# EAGLE board OBC_revA (EAGLE 5.11), part 1 of 2
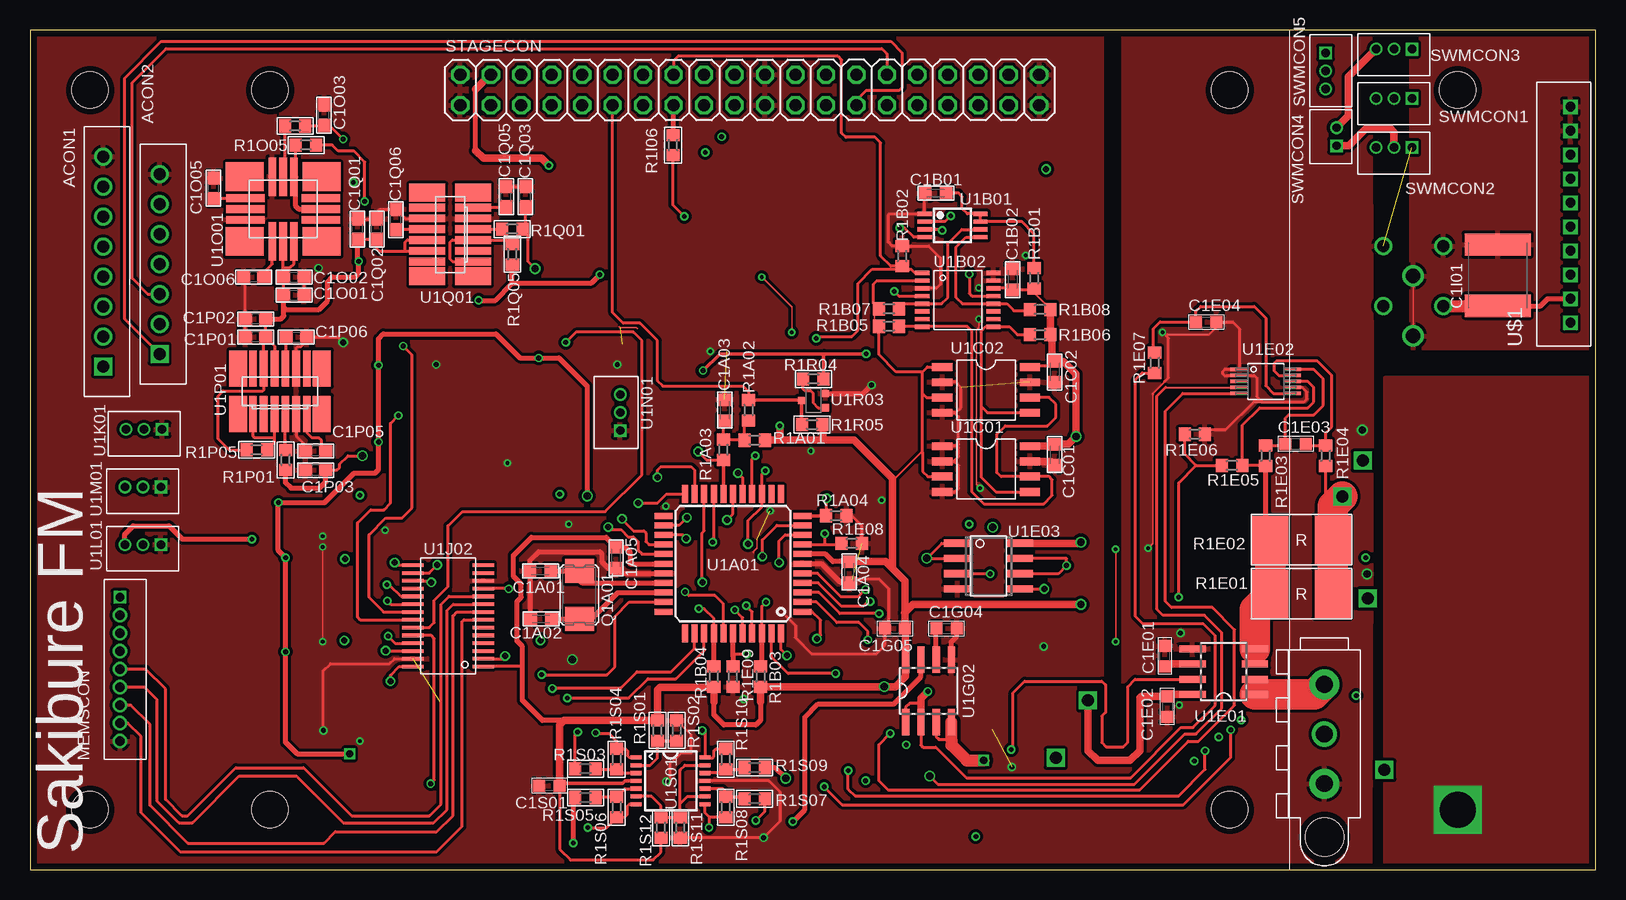
[diagram p0: board, top side]
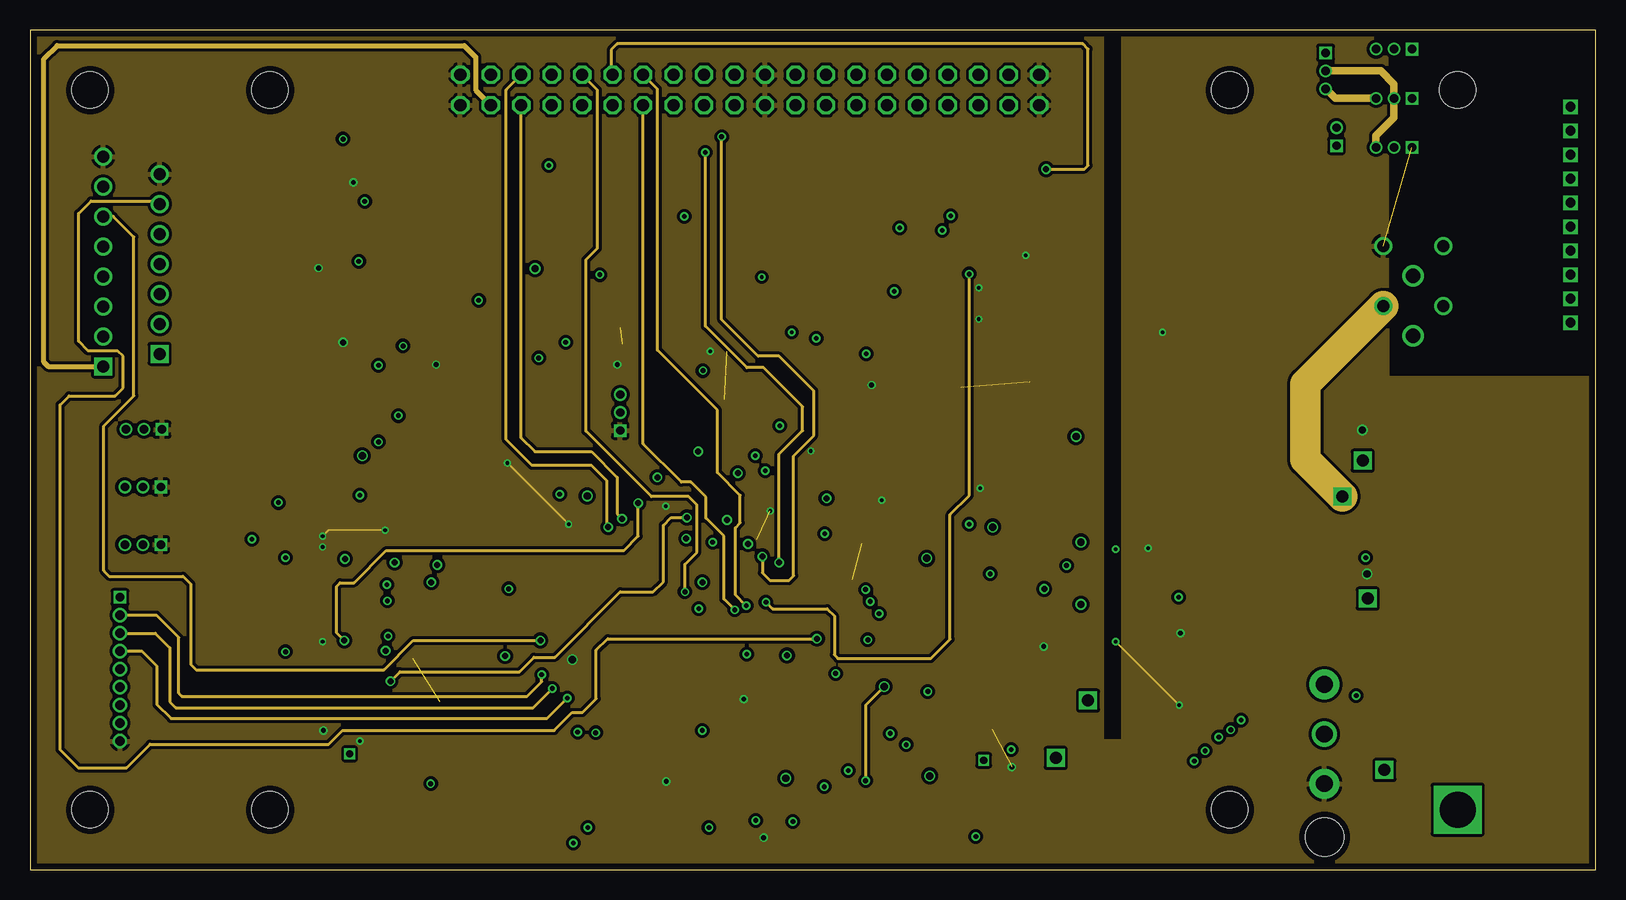
[diagram p1: board, inner layer Route2]
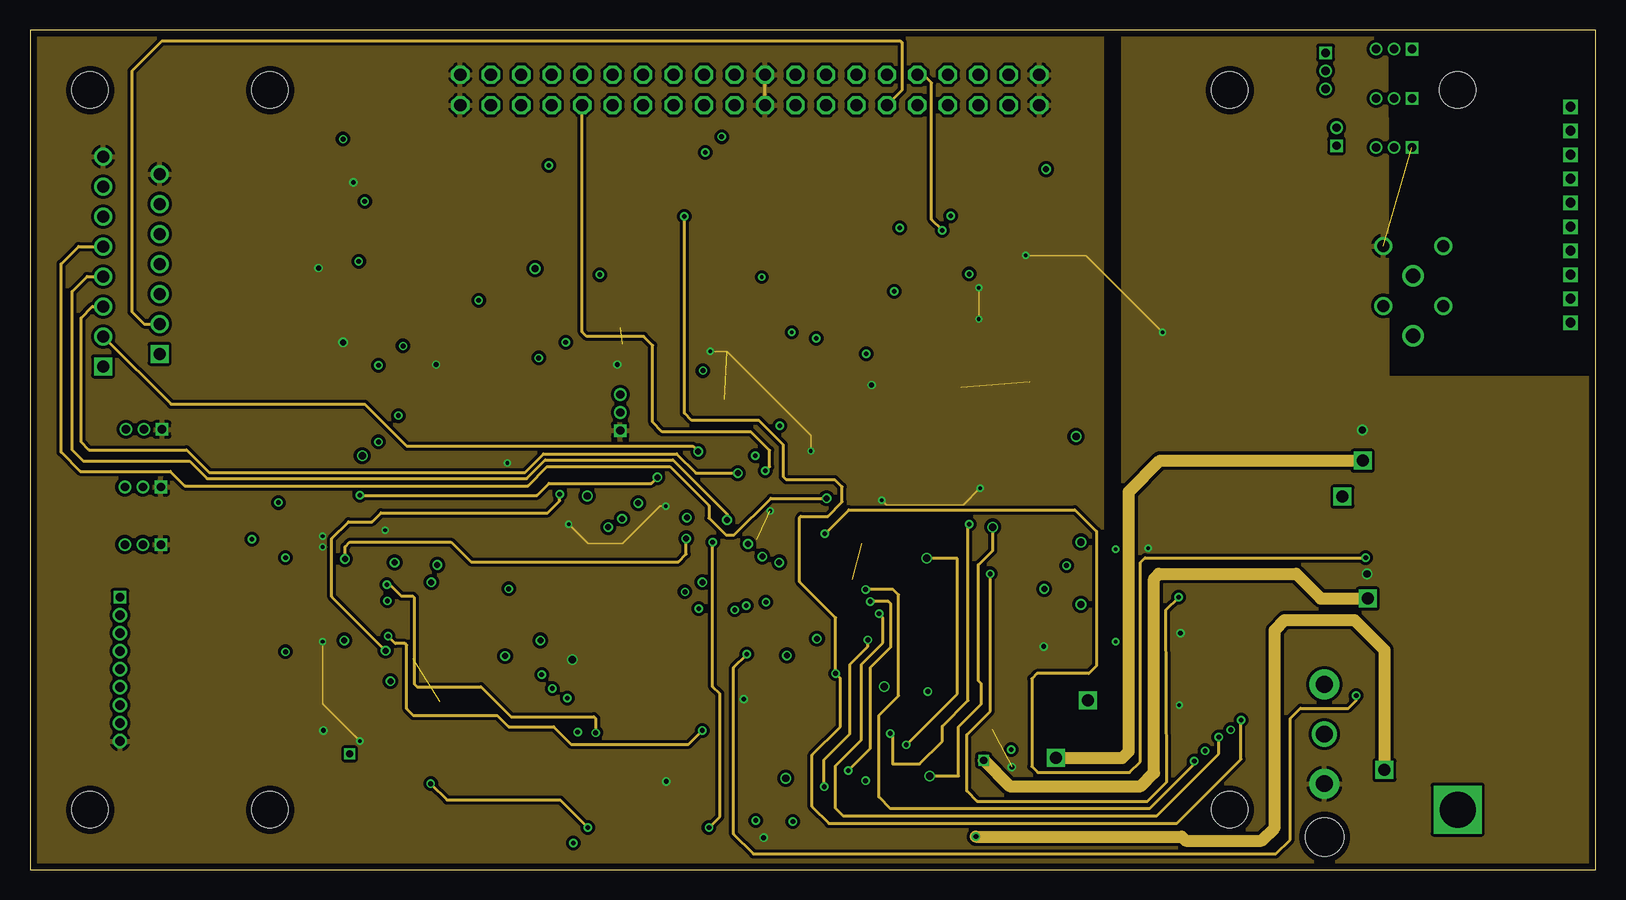
[diagram p2: board, inner layer Route15]
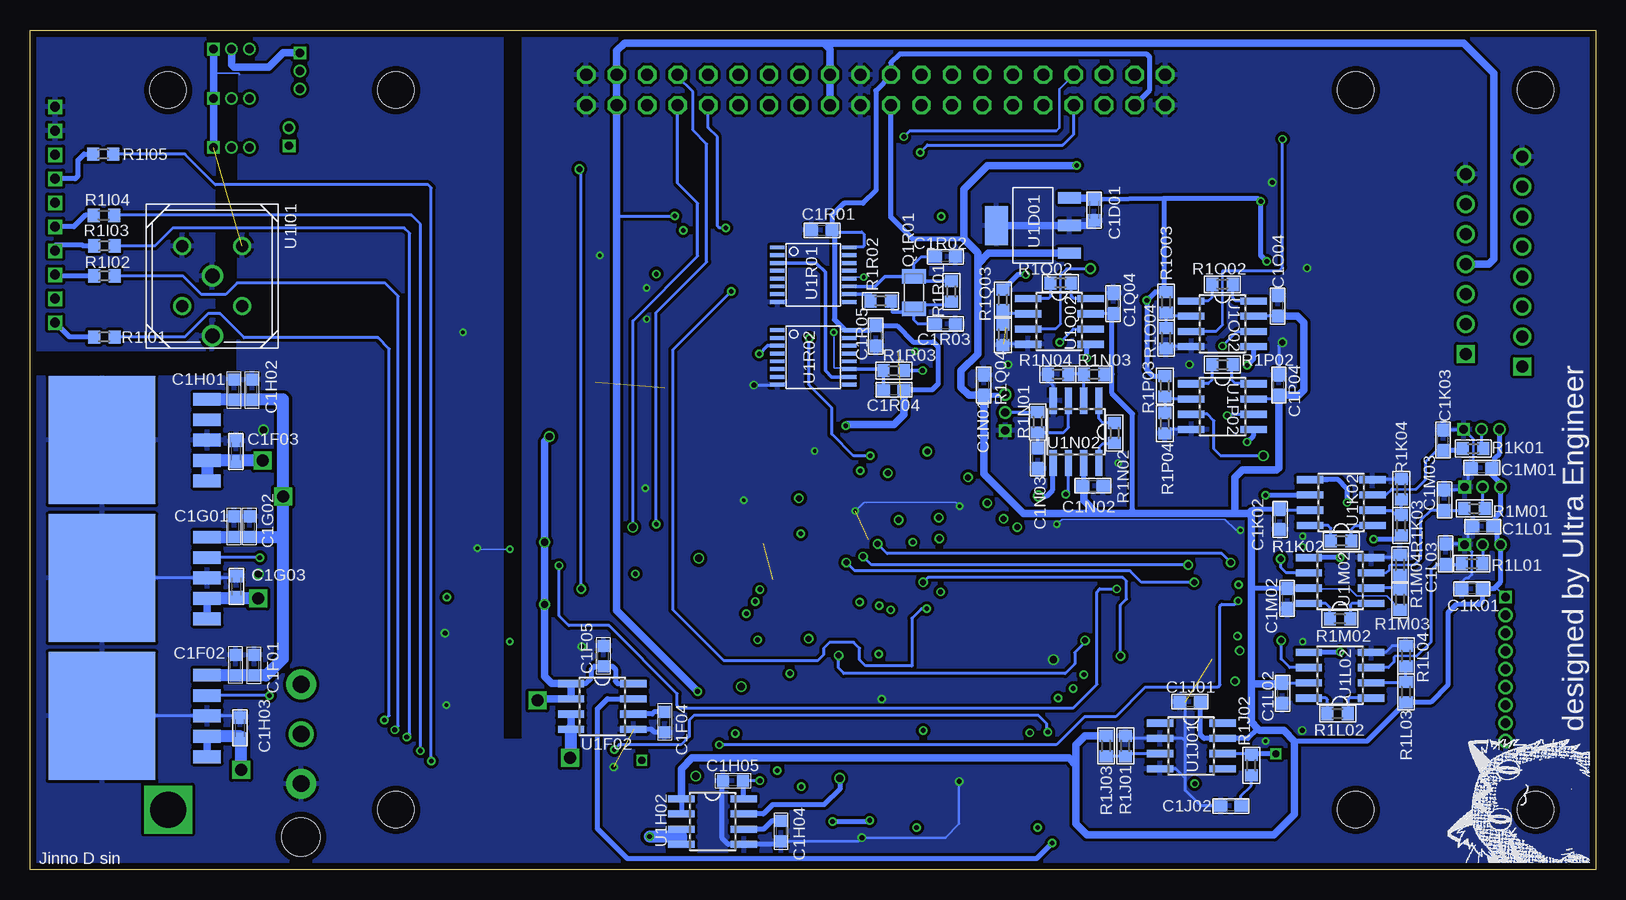
[diagram p3: board, bottom side, seen from below]

Size 130.5 x 70 mm. Coordinates in mm from the lower left corner, seen from the top.
Outline: 0,0 130.5,0 130.5,70 0,70 0,0
Copper layers (1+2*15+16): Top 0.018mm / dielectric 0.25mm / Route2 0.035mm / dielectric 1mm / Route15 0.035mm / dielectric 0.25mm / Bottom 0.018mm
Design rules "pban_5mil-l4": minimum track width 5mil, minimum drill 0.3mm, track to track 5mil, track to pad 0.229mm, pad to pad 5mil, via to via 5mil, smd to smd 5mil, copper to edge 0.5mm, drill to drill 0.5mm, minimum pad ring 0.15mm, minimum via ring 0.15mm, stop-mask expansion 4mil, vias tented up to drill 0.35mm, thermal gap 10mil
Holes 3 mm at 5,65 5,5 119,65 20,65 100,65 20,5 100,5

## Footprints (pad centres in the part's own frame; a part is rotated, then mirrored left to right if it is on the bottom)
EH_8P = drill 1 square: 1 8.75,0 | drill 1 round: 2 6.25,0; 3 3.75,0; 4 1.25,0; 5 -1.25,0; 6 -3.75,0; 7 -6.25,0; 8 -8.75,0
EH_7P = drill 1 square: 1 7.5,0 | drill 1 round: 2 5,0; 3 2.5,0; 4 0,0; 5 -2.5,0; 6 -5,0; 7 -7.5,0
C0603K = smd 1.05 x 1.08: 1 -0.875,0; 2 0.875,0
C1608(0603) = smd 1 x 1: 1 -0.85,0; 2 0.85,0
C2220K = smd 1.85 x 5.5: 1 -2.55,0; 2 2.55,0
C0603 = smd 1.1 x 1: 1 -0.85,0; 2 0.85,0
TE_3P = drill 1.4 pad 2.5 round: 1 -4.14,0; 3 4.14,0 | drill 1.4 round: 2 0,0 | hole 3.2: 8.59,0
ZH9P = drill 0.7 square: 1 6,0 | drill 0.8 round: 2 4.5,0; 3 3,0; 4 1.5,0; 5 0,0; 6 -1.5,0; 7 -3,0; 8 -4.5,0; 9 -6,0
NX5032GA = smd 2 x 2.4: 1 -2,0; 2 2,0
XTAL_3215 = smd 1.2 x 2: 1 -1.35,0; 2 1.35,0
R0603 = smd 1 x 1.1: 1 -0.85,0; 2 0.85,0
2512 = smd 3 x 4: P$1 -2.6,0; P$2 2.6,0
2X20 = drill 1.016 octagon: 1 -24.13,-1.27; 2 -24.13,1.27; 3 -21.59,-1.27; 4 -21.59,1.27; 5 -19.05,-1.27; 6 -19.05,1.27; 7 -16.51,-1.27; 8 -16.51,1.27; 9 -13.97,-1.27; 10 -13.97,1.27; 11 -11.43,-1.27; 12 -11.43,1.27; 13 -8.89,-1.27; 14 -8.89,1.27; 15 -6.35,-1.27; 16 -6.35,1.27; 17 -3.81,-1.27; 18 -3.81,1.27; 19 -1.27,-1.27; 20 -1.27,1.27; 21 1.27,-1.27; 22 1.27,1.27; 23 3.81,-1.27; 24 3.81,1.27; 25 6.35,-1.27; 26 6.35,1.27; 27 8.89,-1.27; 28 8.89,1.27; 29 11.43,-1.27; 30 11.43,1.27; 31 13.97,-1.27; 32 13.97,1.27; 33 16.51,-1.27; 34 16.51,1.27; 35 19.05,-1.27; 36 19.05,1.27; 37 21.59,-1.27; 38 21.59,1.27; 39 24.13,-1.27; 40 24.13,1.27
ZH3P = drill 0.7 round: 1 -1.5,0; 2 0,0 | drill 0.7 square: 3 1.5,0
ZH2P = drill 0.7 square: 1 -0.75,0 | drill 0.7 round: 2 0.75,0
TQFP44 = smd 1.5 x 0.5: 1 -5.8,4; 2 -5.8,3.2; 3 -5.8,2.4; 4 -5.8,1.6; 5 -5.8,0.8; 6 -5.8,0; 7 -5.8,-0.8; 8 -5.8,-1.6; 9 -5.8,-2.4; 10 -5.8,-3.2; 11 -5.8,-4; 23 5.8,-4; 24 5.8,-3.2; 25 5.8,-2.4; 26 5.8,-1.6; 27 5.8,-0.8; 28 5.8,0; 29 5.8,0.8; 30 5.8,1.6; 31 5.8,2.4; 32 5.8,3.2; 33 5.8,4 | smd 0.5 x 1.5: 12 -4,-5.8; 13 -3.2,-5.8; 14 -2.4,-5.8; 15 -1.6,-5.8; 16 -0.8,-5.8; 17 0,-5.8; 18 0.8,-5.8; 19 1.6,-5.8; 20 2.4,-5.8; 21 3.2,-5.8; 22 4,-5.8; 34 4,5.8; 35 3.2,5.8; 36 2.4,5.8; 37 1.6,5.8; 38 0.8,5.8; 39 0,5.8; 40 -0.8,5.8; 41 -1.6,5.8; 42 -2.4,5.8; 43 -3.2,5.8; 44 -4,5.8
TSSOP8 = smd 1.2 x 0.35: 1 -2.325,0.975; 2 -2.325,0.325; 3 -2.325,-0.325; 4 -2.325,-0.975; 5 2.325,-0.975; 6 2.325,-0.325; 7 2.325,0.325; 8 2.325,0.975
TSSOP16 = smd 0.36 x 1.19: 1 -2.24,-3.03; 2 -1.6,-3.03; 3 -0.96,-3.03; 4 -0.32,-3.03; 5 0.32,-3.03; 6 0.96,-3.03; 7 1.6,-3.03; 8 2.24,-3.03; 9 2.24,2.91; 10 1.6,2.91; 11 0.96,2.91; 12 0.32,2.91; 13 -0.32,2.91; 14 -0.96,2.91; 15 -1.6,2.91; 16 -2.24,2.91
SOIC8 = smd 0.65 x 1.7: 1 -1.9,-3.65; 2 -0.63,-3.65; 3 0.64,-3.65; 4 1.91,-3.65; 5 1.91,3.65; 6 0.64,3.65; 7 -0.63,3.65; 8 -1.9,3.65
SOT-223 = smd 0.95 x 1.9: 1 -2.3,-3.05; 2 0,-3.05; 3 2.3,-3.05 | smd 3.25 x 1.9: 4 0,3.05
SO8 = smd 0.6 x 2.2: 1 -1.905,-2.6; 2 -0.635,-2.6; 3 0.635,-2.6; 4 1.905,-2.6; 5 1.905,2.6; 6 0.635,2.6; 7 -0.635,2.6; 8 -1.905,2.6
MSOP10 = smd 1.45 x 0.3: 1 -2.2,1; 2 -2.2,0.5; 3 -2.2,0; 4 -2.2,-0.5; 5 -2.2,-1; 6 2.2,-1; 7 2.2,-0.5; 8 2.2,0; 9 2.2,0.5; 10 2.2,1
DD5 = smd 1.067 x 2.286: 1 -3.404,-8.763; 2 -1.702,-8.763; 3 0,-8.763; 4 1.702,-8.763; 5 3.404,-8.763 | smd 10.668 x 8.89: 6 0,0
BNX01 = drill 1 round: B 2.5,2.5; CB 2.5,-2.5; CG -2.5,-2.5; PSG -2.5,2.5 | drill 1.2 round: CG@2 0,0; CG@3 5,0
ADG707 = smd 1.8 x 0.3: A0 2.925,-2.925; A1 2.925,-3.575; A2 2.925,-4.225; DA 2.925,4.225; DB -2.925,3.575; EN 2.925,-2.275; GND1 -2.925,-2.925; GND2 2.925,3.575; NC -2.925,-3.575; NC1 -2.925,2.925; NC2 -2.925,-4.225; S1A 2.925,-1.625; S1B -2.925,-2.275; S2A 2.925,-0.975; S2B -2.925,-1.625; S3A 2.925,-0.325; S3B -2.925,-0.975; S4A 2.925,0.325; S4B -2.925,-0.325; S5A 2.925,0.975; S5B -2.925,0.325; S6A 2.925,1.625; S6B -2.925,0.975; S7A 2.925,2.275; S7B -2.925,1.625; S8A 2.925,2.925; S8B -2.925,2.275; VDD -2.925,4.225
LM19_XH = drill 0.7 round: 1 -1.5,0; 2 0,0 | drill 0.7 square: 3 1.5,0
CRM100 = smd 3.2 x 0.65: BIT_OUT -3.15,-0.97; BW_CAP 3.15,-0.97; CBIT -3.15,0.83; RESET 3.15,-0.07; SEL0 -3.15,-0.07; VSS 3.15,0.83 | smd 0.65 x 3.2: MODE_SEL 0.9,-2.76; PROG 0,2.62; RATE_OUT 0,-2.76; SEL1 -0.9,-2.76; VDD -0.9,2.62; VREF_CAP 0.9,2.62 | smd 3.15 x 2.4: NEC1 -3.2,2.63; NEC2 -3.2,-2.77; NEC3 3.2,-2.77; NEC4 3.2,2.63
CRM200 = smd 3 x 0.65: BIT_OUT -1.92,1.31; BW_CAP -1.92,-2.29; CBIT 1.88,2.21; MODE_SEL -1.92,-1.39; PROG 1.88,0.41; RATE_OUT -1.92,-0.49; RESET 1.88,-2.29; SEL0 -1.92,2.21; SEL1 -1.92,0.41; VDD 1.88,1.31; VREF_CAP 1.88,-0.49; VSS 1.88,-1.39 | smd 3 x 1.5: NEC1 -1.92,3.44; NEC2 -1.92,-3.52; NEC3 1.88,-3.52; NEC4 1.88,3.44
TSSOP16' = smd 1.2 x 0.32: 1 -3,2.275; 2 -3,1.625; 3 -3,0.975; 4 -3,0.325; 5 -3,-0.325; 6 -3,-0.975; 7 -3,-1.625; 8 -3,-2.275; 9 3,-2.275; 10 3,-1.625; 11 3,-0.975; 12 3,-0.325; 13 3,0.325; 14 3,0.975; 15 3,1.625; 16 3,2.275
SC-70 = smd 0.6 x 0.6: 1 -1,0.6; 2 -1,-0.6; 3 1,0
AD8554ARUZ = smd 0.9 x 0.35: +INA -2.875,0.65; +INB -2.875,-0.65; +INC 2.875,-0.65; +IND 2.875,0.65; -INA -2.875,1.3; -INB -2.875,-1.3; -INC 2.875,-1.3; -IND 2.875,1.3; OUTA -2.875,1.95; OUTB -2.875,-1.95; OUTC 2.875,-1.95; OUTD 2.875,1.95; V+ -2.875,0; V- 2.875,0
PH-10 = drill 0.8 square: 1 -9,0; 2 -7,0; 3 -5,0; 4 -3,0; 5 -1,0; 6 1,0; 7 3,0; 8 5,0; 9 7,0; 10 9,0

## Placement (x,y rotation side)
ACON1  EH8P  [EH_8P]  6.1,50.7 270 top
ACON2  EH7P  [EH_7P]  10.8,50.5 270 top
C1A01  20p  [C0603K]  42.55,24.9 180 top
C1A02  20p  [C0603K]  42.6,20.9 180 top
C1A03  0.1u  [C0603K]  57.9,38.3 90 top
C1A04  0.1u  [C0603K]  68.3,24.8 270 top
C1A05  0.1u  [C0603K]  48.85,26 270 top
C1B01  0.1u  [C0603K]  75.5,56.4 180 top
C1B02  0.1u  [C0603K]  81.9,49.2 90 top
C1C01  0.1u  [C0603K]  85.4,34.6 270 top
C1C02  0.1  [C0603K]  85.4,41.5 270 top
C1D01  10u  [C0603K]  41.8,55 270 bottom
C1E01  0.01u  [C1608(0603)]  94.6,17.8 90 top
C1E02  0.1u  [C1608(0603)]  94.8,13.6 270 top
C1E03  0.1u  [C1608(0603)]  105.5,35.5 0 top
C1E04  0.1uF  [C1608(0603)]  98.05,45.65 0 top
C1F01  0.01u  [C1608(0603)]  111.82,17.03 90 bottom
C1F02  0.1u  [C1608(0603)]  113.37,17.05 90 bottom
C1F03  10u  [C0603K]  113.33,34.87 90 bottom
C1F04  0.01u  [C1608(0603)]  77.6,12.3 270 bottom
C1F05  0.01u  [C1608(0603)]  82.7,17.8 90 bottom
C1G01  0.01u  [C1608(0603)]  113.5,28.6 90 bottom
C1G02  0.1u  [C1608(0603)]  112.2,28.6 90 bottom
C1G03  10u  [C0603K]  113.3,23.6 90 bottom
C1G04  0.01u  [C1608(0603)]  76.4,20.1 0 top
C1G05  0.01u  [C1608(0603)]  72.1,20.1 180 top
C1H01  0.01u  [C1608(0603)]  113.5,40 90 bottom
C1H02  0.1u  [C1608(0603)]  112,40 90 bottom
C1H03  10u  [C0603K]  113,11.8 90 bottom
C1H04  0.01u  [C1608(0603)]  67.9,3.2 270 bottom
C1H05  0.01u  [C1608(0603)]  71.9,7.4 180 bottom
C1I01  47u  [C2220K]  122.35,49.55 90 top
C1J01  0.1u  [C0603]  33.8,14 180 bottom
C1J02  0.1u  [C0603]  30.4,5.3 180 bottom
C1K01  0.1u  [C0603]  10.3,23.4 180 bottom
C1K02  0.1u  [C0603]  26.3,29.2 270 bottom
C1K03  10u  [C0603]  12.7,35.8 90 bottom
C1L01  0.1u  [C0603]  9.4,28.6 180 bottom
C1L02  0.1u  [C0603]  26.1,14.7 270 bottom
C1L03  10u  [C0603]  12.5,26.3 90 bottom
C1M01  0.1u  [C0603]  9.5,33.5 180 bottom
C1M02  0.1u  [C0603]  25.7,22.6 270 bottom
C1M03  10u  [C0603]  12.6,30.8 90 bottom
C1N01  0.1u  [C0603]  51,40.4 90 bottom
C1N02  0.1u  [C0603]  41.9,32 0 bottom
C1N03  10u  [C0603]  46.5,34.3 270 bottom
C1O01  0.01u  [C0603]  22,47.9 0 top
C1O02  0.1u  [C0603]  22,49.4 0 top
C1O03  0.1u  [C0603]  24.5,62.9 90 top
C1O04  0.1u  [C0603]  26.5,47 90 bottom
C1O05  0.1u  [C0603]  15.3,56.8 90 top
C1O06  0.1u  [C0603]  18.65,49.4 180 top
C1P01  0.01u  [C0603]  18.8,44.4 180 top
C1P02  0.1u  [C0603]  18.8,45.9 180 top
C1P03  0.1u  [C0603]  23.8,33.3 180 top
C1P04  0.1u  [C0603]  26.4,40.4 90 bottom
C1P05  0.1u  [C0603]  23.8,34.9 180 top
C1P06  0.1u  [C0603]  22.2,44.4 0 top
C1Q01  0.01u  [C0603]  27.3,53.4 90 top
C1Q02  0.1u  [C0603]  28.9,53.4 90 top
C1Q03  0.1u  [C0603]  41.3,56.1 90 top
C1Q04  0.1u  [C0603]  40.2,47.2 90 bottom
C1Q05  0.1u  [C0603]  39.7,56.1 90 top
C1Q06  0.1u  [C0603]  30.5,54.2 90 top
C1R01  0.1u  [C0603]  64.5,53.3 0 bottom
C1R02  22p  [C0603]  54.2,51.1 180 bottom
C1R03  22p  [C0603]  54.2,45.5 180 bottom
C1R04  10u  [C0603]  58.5,40 180 bottom
C1R05  0.1u  [C0603]  60,44.5 270 bottom
C1S01  0.01u  [C1608(0603)]  43.3,7 180 top
FPCON  TE_770170_3P  [TE_3P]  107.9,11.3 270 top
MEMSCON  ZH-9  [ZH9P]  7.5,16.7 90 top
Q1A01  4MHz  [NX5032GA]  45.8,22.9 270 top
Q1R01  ECX-34S  [XTAL_3215]  56.8,48.1 90 bottom
R1A01  10k  [R0603]  60.4,35.8 0 top
R1A02  1k  [R0603]  59.9,38.3 270 top
R1A03  100  [R0603]  57.8,35 270 top
R1A04  1M  [R0603]  67.2,29.5 180 top
R1B01  100k  [R0603]  83.7,49.3 270 top
R1B02  10k  [R0603]  72.7,51.15 270 top
R1B03  4.7k  [R0603]  60.9,16.1 270 top
R1B04  4.7k  [R0603]  57,16.1 270 top
R1B05  4.7k  [R0603]  71.6,45.3 180 top
R1B06  4.7k  [R0603]  84.2,44.6 0 top
R1B07  4.7k  [R0603]  71.6,46.75 180 top
R1B08  4.7k  [R0603]  84.2,46.7 0 top
R1E01  2mOhm  [2512]  106,23 180 top
R1E02  2mOhm  [2512]  106,27.5 180 top
R1E03  4.7k  [R0603]  103,34.5 270 top
R1E04  4.7k  [R0603]  108,34.5 270 top
R1E05  100k  [R0603]  100.2,33.7 0 top
R1E06  100k  [R0603]  97.1,36.3 180 top
R1E07  1k  [R0603]  93.75,42.25 270 top
R1E08  10k  [R0603]  68.5,27.2 180 top
R1E09  10k  [R0603]  58.6,16.1 90 top
R1I01  47  [R0603]  124.3,44.4 180 bottom
R1I02  47  [R0603]  124.3,49.5 180 bottom
R1I03  47  [R0603]  124.3,52 180 bottom
R1I04  47  [R0603]  124.35,54.55 180 bottom
R1I05  47  [R0603]  124.4,59.65 180 bottom
R1I06  100  [R0603]  53.6,60.4 90 top
R1J01  100k  [R0603]  39.2,10.3 270 bottom
R1J02  10k  [R0603]  28.7,8.7 90 bottom
R1J03  100k  [R0603]  40.8,10.3 90 bottom
R1K01  820  [R0603]  10.2,35.1 0 bottom
R1K02  33k  [R0603]  21.2,27.4 0 bottom
R1K03  2k  [R0603]  16.2,28.7 270 bottom
R1K04  1k  [R0603]  16.2,31.7 270 bottom
R1L01  820  [R0603]  10.3,25.5 0 bottom
R1L02  33k  [R0603]  21.5,13 0 bottom
R1L03  2k  [R0603]  15.8,14.8 270 bottom
R1L04  1k  [R0603]  15.8,17.8 270 bottom
R1M01  820  [R0603]  10.1,30.1 0 bottom
R1M02  33k  [R0603]  21.3,20.9 0 bottom
R1M03  2k  [R0603]  16.3,22.5 270 bottom
R1M04  1k  [R0603]  16.3,25.4 270 bottom
R1N01  820  [R0603]  46.5,37.3 90 bottom
R1N02  33k  [R0603]  40.1,36.4 90 bottom
R1N03  2k  [R0603]  41.8,41.3 0 bottom
R1N04  1k  [R0603]  44.8,41.3 0 bottom
R1O01  8.2k  [R0603]  22.1,62 180 top
R1O02  2k  [R0603]  31.1,48.8 180 bottom
R1O03  1k  [R0603]  35.8,47.3 90 bottom
R1O04  1k  [R0603]  35.8,44.3 90 bottom
R1O05  1k  [R0603]  23,60.4 0 top
R1P01  8.2k  [R0603]  21.3,34.15 90 top
R1P02  2k  [R0603]  31.1,42.1 180 bottom
R1P03  1k  [R0603]  35.9,40.3 90 bottom
R1P04  1k  [R0603]  35.9,37.2 90 bottom
R1P05  1k  [R0603]  18.9,35 180 top
R1Q01  8.2k  [R0603]  40.2,53.4 180 top
R1Q02  2k  [R0603]  44.6,48.9 180 bottom
R1Q03  1k  [R0603]  49.4,47.5 90 bottom
R1Q04  1k  [R0603]  49.4,44.6 90 bottom
R1Q05  1k  [R0603]  40.2,51.3 270 top
R1R01  10M  [R0603]  53.7,48.2 90 bottom
R1R02  100k  [R0603]  59.6,47.4 0 bottom
R1R03  100k  [R0603]  58.5,41.6 0 bottom
R1R04  100  [R0603]  65.3,40.9 180 top
R1R05  10k  [R0603]  65.2,37.1 0 top
R1S01  10k  [R0603]  52.3,11.6 90 top
R1S02  10k  [R0603]  53.9,11.6 270 top
R1S03  1k  [R0603]  46.3,8.4 180 top
R1S04  5k  [R0603]  48.9,9.2 90 top
R1S05  1k  [R0603]  46.3,6 180 top
R1S06  20k  [R0603]  48.9,5.2 90 top
R1S07  1k  [R0603]  60.4,5.9 0 top
R1S08  20k  [R0603]  58,5.2 90 top
R1S09  1k  [R0603]  60.4,8.5 0 top
R1S10  20k  [R0603]  58,9.2 270 top
R1S11  10k  [R0603]  54.2,3.5 270 top
R1S12  10k  [R0603]  52.6,3.5 270 top
STAGECON  [2X20]  60,65 0 top
SWMCON1  ZH-3  [ZH3P]  113.7,64.3 0 top
SWMCON2  ZH-3  [ZH3P]  113.7,60.2 0 top
SWMCON3  ZH-3  [ZH3P]  113.7,68.4 0 top
SWMCON4  ZH-2  [ZH2P]  108.9,61.1 90 top
SWMCON5  ZH-3  [ZH3P]  108,66.6 90 top
U1A01  PIC16F877PT  [TQFP44]  58.6,25.5 180 top
U1B01  PCA9306DP1  [TSSOP8]  76.9,53.7 0 top
U1B02  ADG709  [TSSOP16]  77.4,47.5 270 top
U1C01  24LC1025-I/SM  [SOIC8]  79.7,33.4 270 top
U1C02  24LC1025-I/SM  [SOIC8]  79.7,40 270 top
U1D01  TC1262-VDB  [SOT-223]  46.9,53.7 90 bottom
U1E01  ACS712  [SO8]  99.5,16.5 90 top
U1E02  INA226  [MSOP10]  103,40.7 0 top
U1E03  MCP6022  [SO8]  79.9,25.3 270 top
U1F01  LT1129_DD  [DD5]  124.5,35.8 90 bottom
U1F02  ACS712  [SO8]  82.8,13.6 270 bottom
U1G01  LT1129_DD  [DD5]  124.5,24.3 90 bottom
U1G02  ACS712  [SO8]  74.9,14.9 0 top
U1H01  LT1129_DD  [DD5]  124.5,12.8 90 bottom
U1H02  ACS712  [SO8]  73.6,4 270 bottom
U1I01  BNX01_12  [BNX01]  115.3,49.5 270 bottom
U1J01  AD8541R  [SO8]  33.7,10.3 270 bottom
U1J02  ADG707  [ADG707]  34.85,21.15 180 top
U1K01  LM19_ZH  [LM19_XH]  9.5,36.7 0 top
U1K02  AD623R  [SO8]  21.2,30.6 90 bottom
U1L01  LM19_ZH  [LM19_XH]  9.4,27.1 0 top
U1L02  AD623R  [SO8]  21.3,16.2 90 bottom
U1M01  LM19_ZH  [LM19_XH]  9.4,31.9 0 top
U1M02  AD623R  [SO8]  21.3,24.1 90 bottom
U1N01  LM19_ZH  [LM19_XH]  49.2,38.1 270 top
U1N02  AD623R  [SO8]  43.3,36.5 180 bottom
U1O01  CRM100  [CRM100]  21.1,55 180 top
U1O02  AD623R  [SO8]  31.1,45.5 270 bottom
U1P01  CRM200  [CRM200]  20.8,39.9 90 top
U1P02  AD623R  [SO8]  31.1,38.6 270 bottom
U1Q01  CRM200  [CRM200]  35,52.9 180 top
U1Q02  AD623R  [SO8]  44.7,45.7 270 bottom
U1R01  CD4060BPW  [TSSOP16']  65.2,49.6 0 bottom
U1R02  CD4020BPW  [TSSOP16']  65.2,42.7 0 bottom
U1R03  2SC4116  [SC-70]  65.3,39.1 180 top
U1S01  AD8554ARUZ  [AD8554ARUZ]  53.4,7.4 0 top
U$1  PH-10  [PH-10]  128.4,54.6 90 top

## Library data of the parts
ACON1 ACON2 = EHcon
C1A01-C1A05 C1B01 C1B02 C1C01 C1C02 C1D01 C1F03 C1G03 C1H03 C1I01 C1J01 C1J02 C1K01-C1K03 C1L01-C1L03 C1M01-C1M03 C1N01-C1N03 C1O01-C1O06 C1P01-C1P06 C1Q01-C1Q06 C1R01-C1R05 R1I06 R1J01-R1J03 R1K01-R1K04 R1L01-R1L04 R1M01-R1M04 R1N01-R1N04 R1O01-R1O05 R1P01-R1P05 R1Q01-R1Q05 R1R01-R1R05 R1S01-R1S09 R1S10-R1S12 = util
C1E01-C1E04 C1F01 C1F02 C1F04 C1F05 C1G01 C1G02 C1G04 C1G05 C1H01 C1H02 C1H04 C1H05 C1S01 = capacitor
FPCON = CONN
MEMSCON SWMCON1-SWMCON5 = ZHcon
Q1A01 = OSC
Q1R01 U1R01 U1R02 = Timer_Logic
R1A01-R1A04 R1B01-R1B08 R1E03-R1E09 R1I01-R1I05 = Resistor
R1E01 R1E02 U1E02 = shunt_monitor
STAGECON = Basic
U1A01 = PIC; MF: MICROCHIP; MPN: PIC16F877-04/PQ; OC_FARNELL: 9761411; OC_NEWARK: 23C5094
U1B01 = Levelconverter
U1B02 U1D01 U1E01 U1F02 U1G02 U1H02 = IC
U1C01 U1C02 = Ext_ROM
U1E03 = OPamp
U1F01 U1G01 U1H01 = Power
U1I01 = Filter
U1J01 = IC; MPN: AD8541ARZ; OC_FARNELL: 9603859; OC_NEWARK: 31M4547
U1J02 = ADG707
U1K01 U1L01 U1M01 U1N01 = LM19_ZH
U1K02 U1L02 U1M02 U1N02 U1O02 U1P02 U1Q02 = IC; MPN: AD623ARZ.; OC_FARNELL: 9426213; OC_NEWARK: 31M4186
U1O01 U1P01 U1Q01 = crm
U1R03 = TR
U1S01 = Amp
U$1 = PHcon

## Nets
1HZ: U1R02.9
2HZ: U1R01.3 U1R02.10
!KEY: R1I01.2 U$1.1
ANMPX1: U1A01.24 U1J02.DA
ANMPX2: U1A01.20 U1J02.DB
ANU1: STAGECON.5 U1A01.26
ANU2: STAGECON.6 U1A01.27
BATTERY: C1F01.1 C1F02.1 C1G01.1 C1G02.1 C1H01.1 C1H02.1 R1E01.P$1 R1E02.P$1 R1E04.2 U1F01.5 U1G01.5 U1H01.5 U1I01.B
C3V: U$1.8
CBAT: R1S04.2 U1J02.S1A U1S01.OUTA
CBATP: R1S03.2 U1E01.7
CLKIN: C1A01.1 Q1A01.1 U1A01.30
CLKOUT: C1A02.1 Q1A01.2 U1A01.31
CMAIN: R1S06.1 U1J02.S6A U1S01.OUTB
CMAINP: R1S05.2 U1F02.7
CMSN: R1S08.1 U1A01.19 U1S01.OUTC
CMSNP: R1S07.2 U1G02.7
CSENS: R1S10.1 U1J02.S7A U1S01.OUTD
CSENSP: R1S09.2 U1H02.7
CW_CLK: R1I02.1 U1A01.2
CW_DAT: R1I03.1 U1A01.3
CW_KEY: R1I01.1 R1I06.1 U1A01.43
CW_STB: R1I04.1 U1A01.4
CW_TXE: R1I05.1 U1A01.5
CWCLK: R1I02.2 U$1.3
CWDAT: R1I03.2 U$1.4
CWSTB: R1I04.2 U$1.5
EXT_RST: R1A02.1 R1R05.1 STAGECON.11 U1R03.3
FMRX_RSSI: STAGECON.12 U1E03.5
FMRX_SIG: STAGECON.10 U1A01.38
GND: ACON1.8 ACON2.7 C1A01.2 C1A02.2 C1A03.2 C1A04.2 C1A05.2 C1B01.2 C1B02.2 C1C01.2 C1C02.2 C1D01.2 C1E01.2 C1E02.2 C1E04.2 C1F01.2 C1F02.2 C1F03.2 C1F04.2 C1F05.2 C1G01.2 C1G02.2 C1G03.2 C1G04.2 C1G05.2 C1H01.2 C1H02.2 C1H03.2 C1H04.2 C1H05.2 C1J01.2 C1J02.2 C1K01.2 C1K02.2 C1K03.2 C1L01.2 C1L02.2 C1L03.2 C1M01.2 C1M02.2 C1M03.2 C1N01.2 C1N02.2 C1N03.2 C1O01.2 C1O02.2 C1O03.2 C1O04.2 C1O05.2 C1O06.2 C1P01.2 C1P02.2 C1P03.2 C1P04.2 C1P05.2 C1P06.2 C1Q01.2 C1Q02.2 C1Q03.2 C1Q04.2 C1Q05.2 C1Q06.2 C1R01.1 C1R02.1 C1R03.1 C1R05.2 C1S01.2 FPCON.3 MEMSCON.9 R1A04.1 R1B02.1 R1E06.1 R1E08.1 R1E09.1 R1J01.1 R1K04.1 R1L04.1 R1M04.1 R1N04.1 R1O04.1 R1P04.1 R1Q04.1 R1S02.1 R1S11.2 STAGECON.1 STAGECON.2 STAGECON.21 STAGECON.22 STAGECON.39 STAGECON.40 SWMCON1.3 SWMCON2.3 SWMCON3.3 U1A01.6 U1A01.29 U1B01.1 U1B02.3 U1B02.15 U1B02.16 U1C01.1 U1C01.2 U1C01.4 U1C01.7 U1C02.2 U1C02.4 U1C02.7 U1D01.2 U1D01.4 U1E01.5 U1E02.1 U1E02.2 U1E02.7 U1E03.4 U1F01.3 U1F01.6 U1F02.5 U1G01.3 U1G01.6 U1G02.5 U1H01.3 U1H01.6 U1H02.5 U1I01.PSG U1J01.2 U1J01.4 U1J02.GND1 U1J02.GND2 U1K01.3 U1K02.4 U1L01.3 U1L02.4 U1M01.3 U1M02.4 U1N01.3 U1N02.4 U1O01.MODE_SEL U1O01.VSS U1O02.4 U1P01.MODE_SEL U1P01.VSS U1P02.4 U1Q01.MODE_SEL U1Q01.VSS U1Q02.4 U1R01.8 U1R02.8 U1R03.2 U1S01.V-
GYRO1: U1J02.S3A U1O02.6
GYRO2: U1J02.S4A U1P02.6
GYRO3: U1J02.S5A U1Q02.6
MAINTEMP: U1J02.S8A U1N02.6
MCLR: ACON1.2 R1A03.2 U1A01.18
MEM0: R1B05.1 U1B02.8 U1C01.6 U1C02.6
MEM1: R1B06.1 U1B02.9 U1C01.5 U1C02.5
MEM_SEL: R1B02.2 STAGECON.16 U1A01.15 U1B02.1
MEMS1: MEMSCON.2 U1A01.32
MEMS2: MEMSCON.3 U1A01.35
MEMS3: MEMSCON.4 U1A01.36
MEMSADC1: MEMSCON.5 U1J02.S2B
MEMSADC2: MEMSCON.6 U1J02.S3B
MEMSADC3: MEMSCON.7 U1J02.S4B
MEMSADC4: MEMSCON.8 U1J02.S5B
MPX1: STAGECON.7 U1A01.9 U1J02.A0
MPX2: STAGECON.8 U1A01.10 U1J02.A1
MPX3: STAGECON.9 U1A01.14 U1J02.A2
N$1: FPCON.1 U1E01.1 U1E01.2
N$2: C1R04.2 R1R03.1 U1R01.12 U1R02.11
N$3: R1P05.1 U1P01.SEL0 U1P01.SEL1
N$4: R1E01.P$2 R1E02.P$2 R1E03.2 R1E05.2 U1E01.3 U1E01.4 U1E02.8
N$5: C1F03.1 U1F01.1 U1F01.2 U1F02.3 U1F02.4
N$6: C1A03.1 R1A01.1 R1A02.2 R1A03.1
N$7: R1K01.2 U1K01.2
N$8: R1J01.2 R1J03.1 U1J01.3
N$10: C1E01.1 U1E01.6
N$11: R1R03.2 R1R04.1 U1R02.3
N$12: C1G03.1 U1G01.1 U1G01.2 U1G02.3 U1G02.4
N$13: C1H03.1 U1H01.1 U1H01.2 U1H02.3 U1H02.4
N$15: C1E03.1 R1E03.1 U1E02.10
N$16: C1E03.2 R1E04.1 U1E02.9
N$17: C1K03.1 R1K01.1 U1K02.3
N$18: C1J02.1 R1J02.1
N$19: R1B07.1 U1B01.6 U1B02.5
N$20: R1B08.1 U1B01.5 U1B02.12
N$21: C1F04.1 U1F02.6
N$23: C1E04.1 R1E07.1 U1E02.6
N$24: C1B01.1 R1B01.1 U1B01.7 U1B01.8
N$25: C1G04.1 U1G02.6
N$27: R1K02.2 U1K02.1
N$28: C1H04.1 U1H02.6
N$32: ACON1.7
N$35: R1S01.1 R1S02.2 U1S01.-INA
N$36: R1S11.1 R1S12.1 U1S01.-INB U1S01.-INC U1S01.-IND
N$37: R1R04.2 U1R03.1
N$38: ACON2.5
N$39: R1S09.1 R1S10.2 U1S01.+IND
N$41: R1K02.1 U1K02.8
N$42: R1K03.1 R1K04.2 U1K02.2
N$43: R1Q05.1 U1Q01.SEL0 U1Q01.SEL1
N$44: R1O05.1 U1O01.SEL0 U1O01.SEL1
N$45: C1O03.1 R1O01.1 U1O02.3
N$46: R1L01.2 U1L01.2
N$47: C1L03.1 R1L01.1 U1L02.3
N$48: R1L02.2 U1L02.1
N$49: R1L02.1 U1L02.8
N$50: R1L03.1 R1L04.2 U1L02.2
N$51: R1M01.2 U1M01.2
N$52: C1M03.1 R1M01.1 U1M02.3
N$53: R1M02.2 U1M02.1
N$54: R1M02.1 U1M02.8
N$55: R1M03.1 R1M04.2 U1M02.2
N$56: R1O02.2 U1O02.1
N$57: R1O02.1 U1O02.8
N$58: R1O03.1 R1O04.2 U1O02.2
N$60: R1N01.2 U1N01.2
N$61: C1P03.1 R1P01.1 U1P02.3
N$62: R1P02.2 U1P02.1
N$63: R1P02.1 U1P02.8
N$64: R1P03.1 R1P04.2 U1P02.2
N$66: C1N03.1 R1N01.1 U1N02.3
N$67: C1Q03.1 R1Q01.1 U1Q02.3
N$68: R1Q02.2 U1Q02.1
N$69: R1Q02.1 U1Q02.8
N$70: R1Q03.1 R1Q04.2 U1Q02.2
N$71: R1S03.1 R1S04.1 U1S01.+INA
N$72: R1N02.2 U1N02.1
N$73: C1Q05.1 U1Q01.BW_CAP
N$74: C1Q06.1 U1Q01.VREF_CAP
N$75: C1P06.1 U1P01.VREF_CAP
N$76: C1O06.1 U1O01.VREF_CAP
N$77: C1O05.1 U1O01.BW_CAP
N$78: C1P05.1 U1P01.BW_CAP
N$79: R1N02.1 U1N02.8
N$80: R1N03.1 R1N04.2 U1N02.2
N$81: R1O01.2 U1O01.RATE_OUT
N$82: R1P01.2 U1P01.RATE_OUT
N$83: R1Q01.2 U1Q01.RATE_OUT
N$85: R1S05.1 R1S06.2 U1S01.+INB
N$86: R1S07.1 R1S08.2 U1S01.+INC
N$87: C1R03.2 Q1R01.1 R1R01.1 R1R02.2
N$88: C1R02.2 Q1R01.2 R1R01.2 U1R01.11
N$89: R1R02.1 U1R01.10
N$96: R1I06.2 STAGECON.15
N$97: STAGECON.17
N$101: STAGECON.25
N$106: STAGECON.35
N$117: STAGECON.18
N$121: STAGECON.26
N$122: STAGECON.28
N$126: STAGECON.36
PGC: ACON1.3 U1A01.16
PGD: ACON1.4 U1A01.17
PGM: ACON1.5 R1A04.2 U1A01.11
R3V: U$1.6
REF1: R1J02.2 U1J01.6 U1K02.5 U1L02.5 U1M02.5 U1N02.5 U1O02.5 U1P02.5 U1Q02.5
RSSIOUT: U1E03.6 U1E03.7 U1J02.S1B
RST_MSN: ACON2.1 STAGECON.27
RX_MSN: ACON2.3 STAGECON.30
RX_P: ACON2.6 U1A01.1
SCL2_MSN: STAGECON.34 U1E02.5
SCL_MSN: STAGECON.32 U1B01.3
SCL_P: R1B04.1 U1A01.37 U1B02.4
SDA2_MSN: STAGECON.33 U1E02.4
SDA_MSN: STAGECON.31 U1B01.4
SDA_P: R1B03.1 U1A01.42 U1B02.13
ST_LSB: STAGECON.14 U1A01.41
ST_MSB: STAGECON.13 U1A01.40
SW_MSN: R1E08.2 U1A01.8 U1G01.4
SW_SENS: R1E09.2 U1A01.39 U1H01.4
SWM1: SWMCON1.1 SWMCON5.1
SWM2: SWMCON1.2 SWMCON2.1 SWMCON5.2
SWM3: SWMCON2.2 SWMCON4.1
SWM4: SWMCON3.1 SWMCON4.2
SWM5: SWMCON3.2 SWMCON5.3
TGND: C1I01.2 U1I01.CG U1I01.CG@2 U1I01.CG@3 U$1.9 U$1.10
TX_MSN: ACON2.2 STAGECON.29
TX_P: ACON1.6 U1A01.44
TXE: R1I05.2 U$1.7
TXTEMP1: U1A01.21 U1K02.6
TXTEMP2: U1A01.22 U1L02.6
TXTEMP3: U1A01.25 U1M02.6
VBAT: U1E03.1 U1E03.2 U1J02.S2A
VBAT_1/2: R1E05.1 R1E06.2 U1E03.3
VBTX: C1I01.1 U1I01.CB U$1.2
VCC1: ACON1.1 C1A04.1 C1A05.1 C1B02.1 C1C01.1 C1C02.1 C1E02.1 C1F05.1 C1G05.1 C1H05.1 C1R01.2 C1R04.1 C1R05.1 C1S01.1 R1A01.2 R1B01.2 R1B03.2 R1B04.2 R1B05.2 R1B06.2 R1B07.2 R1B08.2 R1R05.2 R1S01.2 R1S12.2 STAGECON.3 STAGECON.20 U1A01.7 U1A01.28 U1B02.2 U1B02.14 U1C01.3 U1C01.8 U1C02.1 U1C02.3 U1C02.8 U1E01.8 U1E03.8 U1F02.1 U1F02.2 U1F02.8 U1G02.8 U1H02.8 U1J02.VDD U1R01.16 U1R02.16 U1S01.V+
VCC2: ACON2.4 R1E07.2 STAGECON.23 STAGECON.24 STAGECON.37 STAGECON.38 U1B01.2 U1G02.1 U1G02.2
VCC3: C1J01.1 C1K01.1 C1K02.1 C1L01.1 C1L02.1 C1M01.1 C1M02.1 C1N01.1 C1N02.1 C1O04.1 C1P04.1 C1Q04.1 MEMSCON.1 R1J03.2 R1K03.2 R1L03.2 R1M03.2 R1N03.2 STAGECON.4 STAGECON.19 U1D01.1 U1H02.1 U1H02.2 U1J01.7 U1K01.1 U1K02.7 U1L01.1 U1L02.7 U1M01.1 U1M02.7 U1N01.1 U1N02.7 U1O02.7 U1P02.7 U1Q02.7
VCC3_3.3V: C1D01.1 C1O01.1 C1O02.1 C1P01.1 C1P02.1 C1Q01.1 C1Q02.1 R1O03.2 R1O05.2 R1P03.2 R1P05.2 R1Q03.2 R1Q05.2 U1D01.3 U1O01.PROG U1O01.VDD U1P01.PROG U1P01.VDD U1Q01.PROG U1Q01.VDD